# Altium PCB OPA847.PcbDoc
Units mm, origin at the board's own origin, x right, y up, seen from the top; angles counter-clockwise.
Board outline 50 x 30 mm, 2 copper layers (Top Layer, Bottom Layer); 16 components, 10 nets, 45 pads, 8 vias.
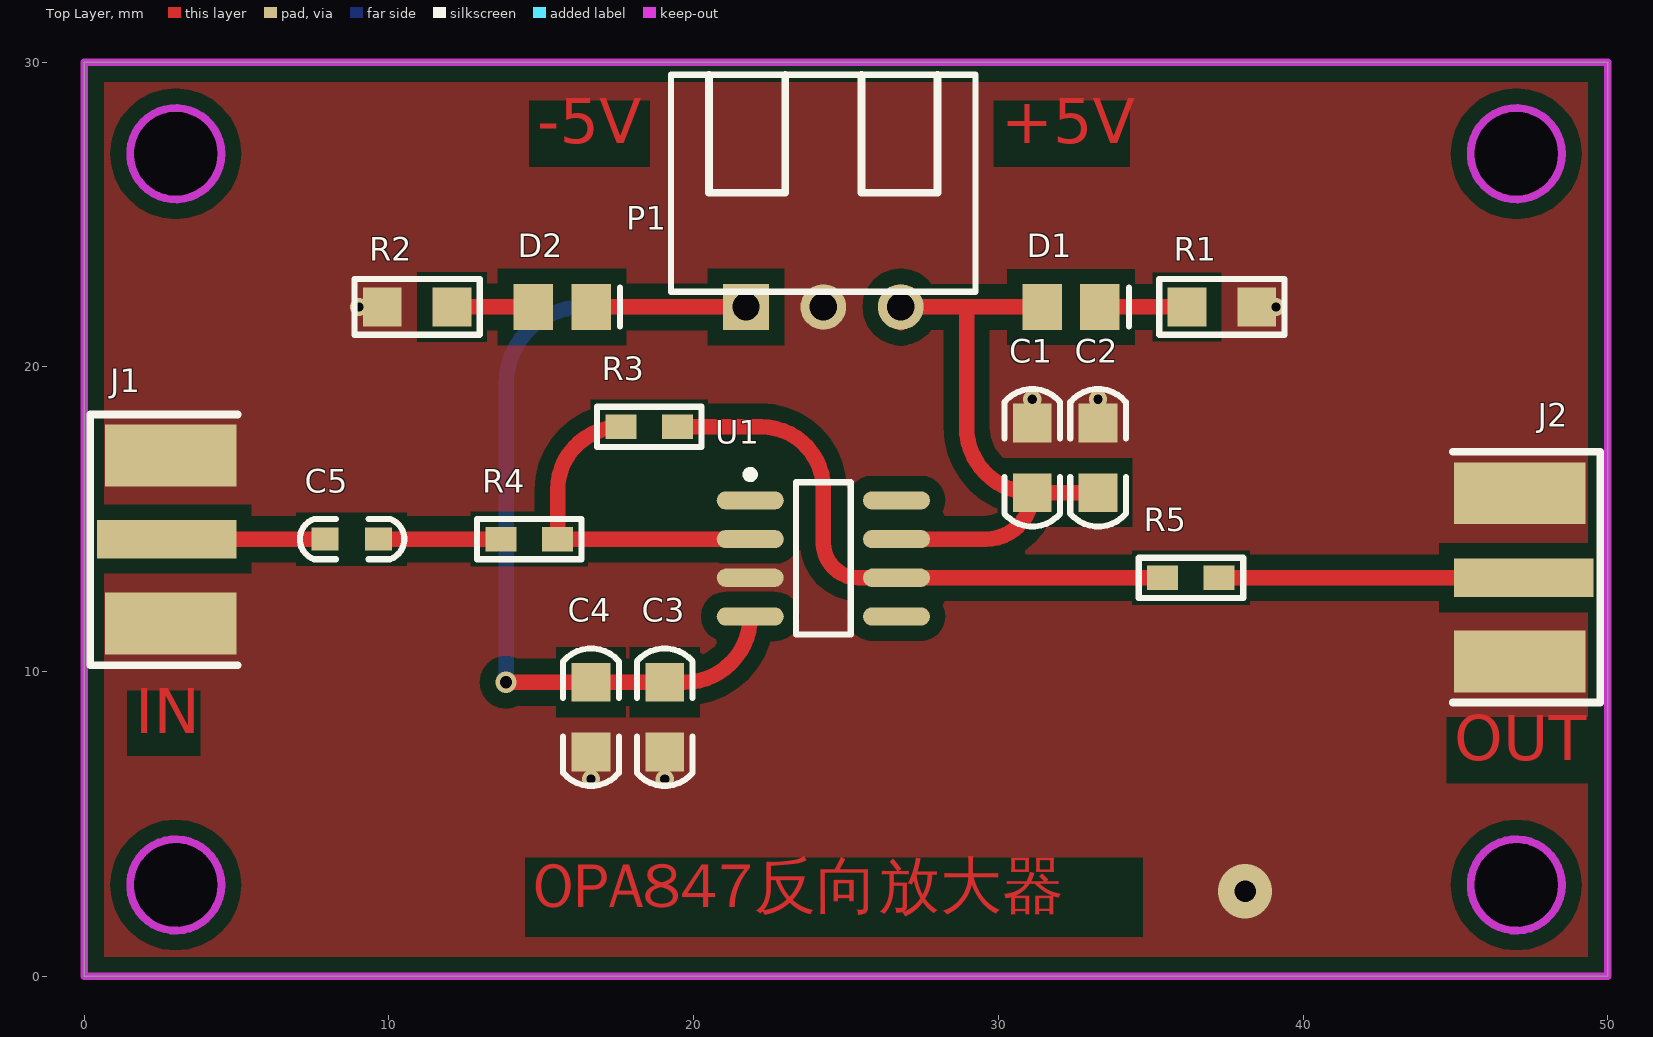
[diagram p0: Top Layer view]
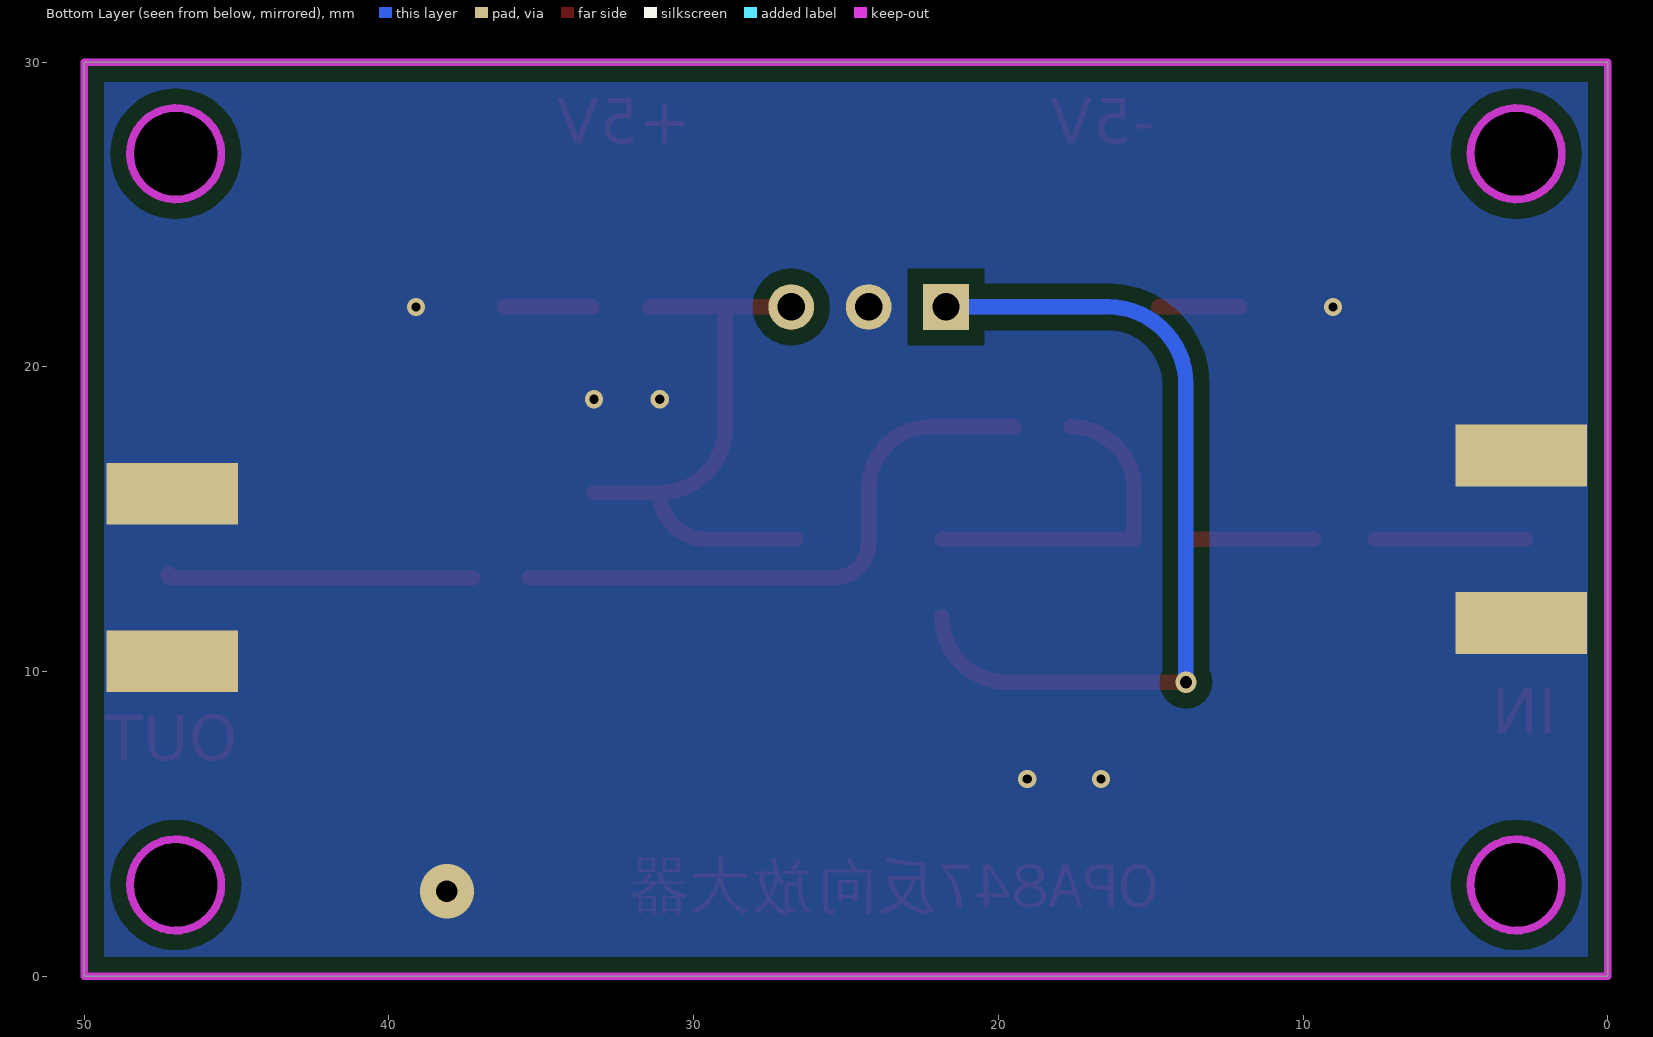
[diagram p1: Bottom Layer view, seen from below]
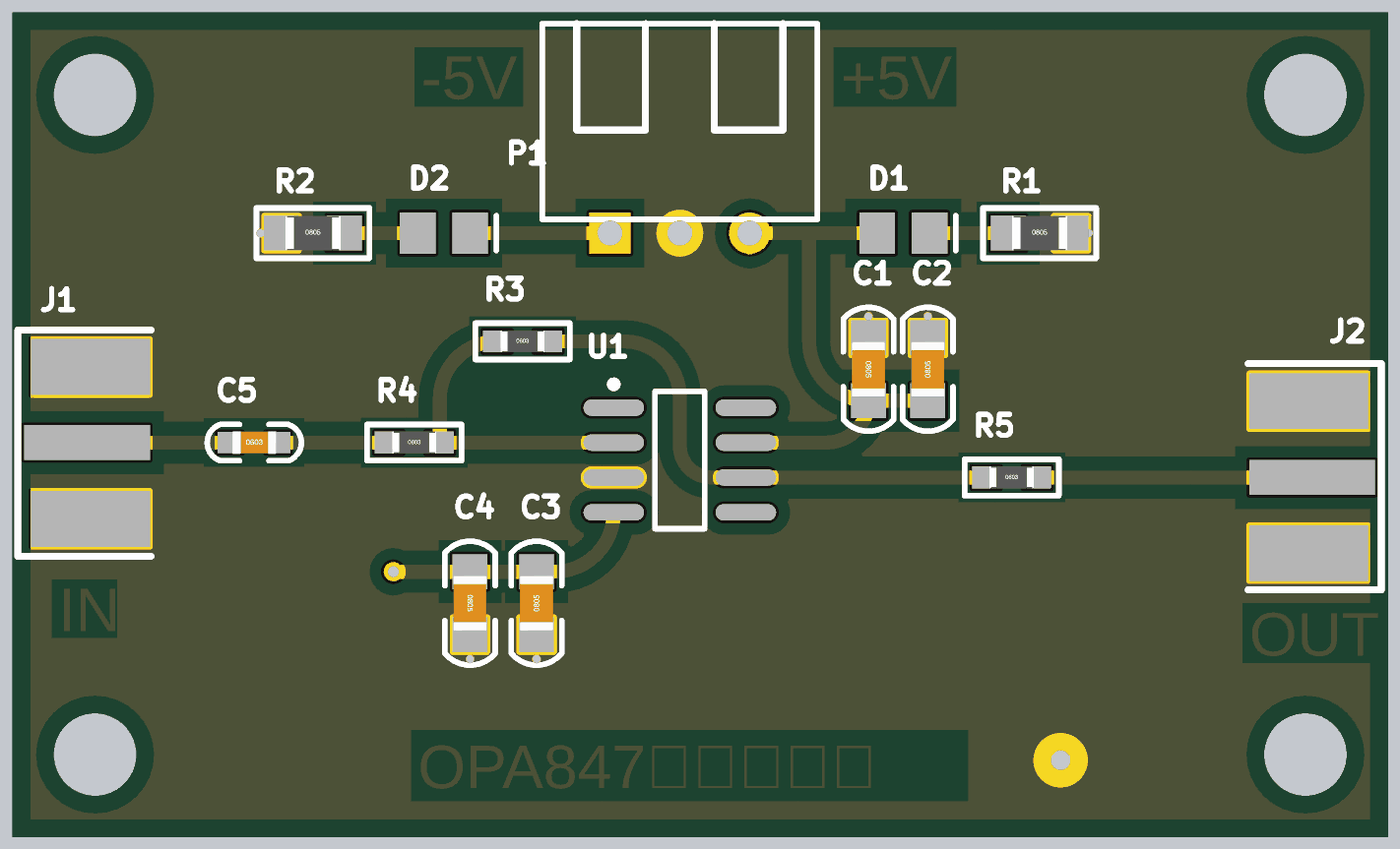
[diagram p2: 3D render of the assembled board from above, using the file's embedded part models]

## Layer stack, top to bottom
Top Solder: solder mask 0.0102, Solder Resist, Dk 3.5
Top Layer: signal copper 0.0356
Dielectric 1: dielectric 0.32, FR-4, Dk 4.8
Bottom Layer: signal copper 0.0356
Bottom Solder: solder mask 0.0102, Solder Resist, Dk 3.5

## Board outline
0,0 50,0 50,30 0,30
cut-out: 45.5,3 ccw(c47,3) 47,1.5 ccw(c47,3) 48.5,3 ccw(c47,3) 47,4.5 ccw(c47,3)
cut-out: 3,1.5 cw(c3,3) 1.5,3 cw(c3,3) 3,4.5 cw(c3,3) 4.5,3 cw(c3,3)
cut-out: 45.5,27 ccw(c47,27) 47,25.5 ccw(c47,27) 48.5,27 ccw(c47,27) 47,28.5 ccw(c47,27)
cut-out: 3,25.5 cw(c3,27) 1.5,27 cw(c3,27) 3,28.5 cw(c3,27) 4.5,27 cw(c3,27)

## Design rules (kind name [scope] priority, off if disabled: settings)
Clearance [All] p1: gap=0.254 ignorepadtopadclearanceinfootprint=FALSE except(0: Arc-Hole Track-Hole SMDPad-Hole THPad-Hole Via-Hole Fill-Hole Poly-Hole Region-Hole Text-Hole; 0.508: Arc-Poly Track-Poly SMDPad-Poly THPad-Poly Via-Poly Fill-Poly Poly-Poly)
MinimumSolderMaskSliver [All] p1: minsoldermaskwidth=0
PolygonConnect [All] p1: connectstyle=Direct reliefconductorwidth=0.254 reliefentries=4 polygonreliefangle="90 Angle" airgapwidth=0.254
RoutingVias [All] p1: holewidth=0.711 width=1.524 viastyle="Through Hole" minholewidth=0.3 minwidth=0.6 maxholewidth=0.711 maxwidth=2.54
SilkToSilkClearance [All] p1: silktosilkclearance=0
SilkToSolderMaskClearance [IsPad] p1: minsilkscreentomaskgap=0 clearancetoexposedcopper=TRUE
SolderMaskExpansion [All] p1: expansion=0.102
Width [All] p1: maxlimit=2.54 minlimit=0.025 preferedwidth=0.762
27 further rules are at their usual default settings.

## Classes and differential pairs
component class OPA847: C1 C2 C3 C5 D1 D2 J1 J2 P1 R1 R2 R3 R4 R5 U1

## Components (designator, comment, footprint, x,y, rotation, side; value= is the part's Value field where it differs from the comment)
C1 "104" "C 0805" 31.115,17.018 r270 top
C2 "10uF" "C 0805" 33.274,17.018 r90 top
C3 "104" "C 0805" 19.05,8.509 r90 top
C4 "10uF" "C 0805" 16.632,8.509 r270 top
C5 "104" "C 0603" 8.788,14.351 r0 top
D1 "LED" LED_0805 32.385,21.971 r0 top
D2 "LED" LED_0805 15.682,21.971 r0 top
J1 "COAX" MCX5.08-5-H 2.707,14.351 r180 top
J2 "COAX" MCX5.08-5-H 47.244,13.081 r0 top
P1 "Header 3" HDR3X1_B2 24.257,21.971 r0 top
R1 "1K" "R 0805" 37.338,21.971 r0 top
R2 "1K" "R 0805" 10.922,21.971 r0 top
R3 "1K" "R 0603" 18.542,18.034 r0 top
R4 "50" "R 0603" 14.605,14.351 r0 top
R5 "50" "R 0603" 36.322,13.081 r0 top
U1 "OPA847" SO8_N 24.257,13.716 r0 top

## Footprints (in the part's own frame and the unit in brackets; to place one, negate y for a bottom-side part, rotate by r counter-clockwise, add the part's x,y. Pads: shape width x height; smd on the part's side, far side on the other; paste and mask are expansions set on the pad)
"C 0603" [mil] "无极性贴片电容"
  rect 35x30 smd: 1(-35,0) 2(34,0)
  silkscreen extent -67,-26 67,26, body extent -31,-16 31,16, height 32
"C 0805" [mil] "无极性贴片电容"
  rect 50x50 smd: 1(-45,0) 2(45,0)
  silkscreen extent -89,-36 89,36, body extent -39,-24 39,24, height 20
HDR3X1_B2 [mm] "Connector; Header; 3 Position"
  rect 1.5x1.5 hole 0.9: 1(-2.54,0)
  round 1.5 hole 0.9: 2(0,0) 3(2.54,0)
  silkscreen extent -5,0.5 5,7.62, body extent -5,0.5 5,7.62, height 6
LED_0805 [mm] "贴片二极管"
  rect 1.3x1.5 smd: 1(-0.95,0) 2(0.95,0)
  silkscreen extent 1.91,-0.64 1.91,0.64
MCX5.08-5-H [mil]
  rect 180x50 smd: 1(0,0)
  rect 170x80 smd: 2(-5,109.25) 5(-5,-108.27)
  rect 170x80 smd far side: 3(-5,108.66) 4(-5,-107.87)
  silkscreen extent -92,-161 99,163, body extent -93,-132 80,134, height 39
"R 0603" [mil] "1/10W贴片电阻"
  rect 40x31.5 smd: 1(-36.5,0) 2(36.5,0)
  silkscreen extent -68,-26 68,26, body extent -31,-16 32,16, height 16
"R 0805" [mil] "1/8W贴片电阻"
  rect 50x50 smd: 1(-45,0) 2(45,0)
  silkscreen extent -81,-36 81,36, body extent -39,-25 39,25, height 20
SO8_N [mm] "SOIC, 8-Leads, Body 4.9x3.9mm, Pitch 1.27mm, IPC Medium Density"
  oval 2.2x0.6 smd: 1(-2.4,1.905) 2(-2.4,0.635) 3(-2.4,-0.635) 4(-2.4,-1.905) 5(2.4,-1.905) 6(2.4,-0.635) 7(2.4,0.635) 8(2.4,1.905)
  silkscreen extent -2.52,-2.5 0.9,2.88, body extent -2,-2.5 2,2.5, height 1.75

## Part data
C1 C2 C3 C4 C5: library part C, "无极性贴片电容"
D1 D2: "发光二极管", LatestRevisionDate=08-Jul-2005, LatestRevisionNote="Mech Layer 1 removed.", PackageReference=LED, Published=8-Jun-2000, Publisher="Altium Limited"
P1: "接插件", LatestRevisionDate=17-Jul-2002, LatestRevisionNote="Re-released for DXP Platform.", Publisher="Altium Limited"
R1 R2 R3 R4 R5: library part R, "贴片电阻"
U1: "Wideband, Ultra-Low Noise, Voltage-Feedback"

## Via types
v1: diameter 0.6, hole 0.3, Top Layer to Bottom Layer, tented both sides, 6 vias
v2: diameter 1.778, hole 0.711, Top Layer to Bottom Layer, 1 vias
v3: diameter 0.7, hole 0.4, Top Layer to Bottom Layer, 1 vias

## Nets (pads, with @x,y where several pads share a name; then routed paths per layer and width w, separated by ;. In a path a pad name is that pad's centre, name@x,y a point inside that pad or via, vN(x,y) a via of type N, cw(c..) or ccw(c..) an arc to the next point about the centre after c; other vN are vias at no path point)
+5V: C1.2 C2.1 D1.1 P1.3 U1.7 | length 20
  Top Layer w0.508: U1.7 29.591,14.351 ccw(c29.591,15.875) C1.2 ; P1.3@26.797,21.449 P1.3 28.956,21.971 ; D1.1 28.956,21.971 ; C2.1 C1.2 ; 28.956,21.971 28.956,18.034 ccw(c31.115,18.034) C1.2
-5V: C3.2 C4.1 D2.2 P1.1 U1.4 | length 33.4
  Top Layer w0.508: v3(13.843,9.652) 16.764,9.652 C3.2 19.698,9.652 ccw(c19.698,11.811) U1.4 ; D2.2 P1.1
  Bottom Layer w0.508: v3(13.843,9.652) 13.843,19.431 cw(c16.383,19.431) 16.383,21.971 P1.1
GND: C1.1 C2.2 C3.1 C4.2 J1.2 J1.3 J1.4 J1.5 J2.2 J2.3 J2.4 J2.5 P1.2 R1.2 R2.1 U1.3
  other v1: 16.632,6.477 19.05,6.477 31.115,18.942 33.274,18.942 9.017,21.971 39.116,21.971
  other v2: 38.1,2.794
NetC5_1: C5.1 J1.1 | length 4.9
  Top Layer w0.508: J1.1 C5.1@7.62,14.351
NetC5_2: C5.2 R4.1 | length 4
  Top Layer w0.508: C5.2 R4.1
NetD1_2: D1.2 R1.1 | length 2.9
  Top Layer w0.508: D1.2 R1.1
NetD2_1: D2.1 R2.2 | length 2.7
  Top Layer w0.508: R2.2 D2.1
NetJ2_1: J2.1 R5.2 | length 10.1
  Top Layer w0.508: R5.2 47.117,13.081 ccw(c47.117,13.208) J2.1@47.244,13.208
NetR3_1: R3.1 R4.2 U1.2 | length 11.2
  Top Layer w0.508: R3.1 ccw(c17.615,15.951) 15.532,15.951 R4.2 U1.2
NetR3_2: R3.2 R5.1 U1.6 | length 19.5
  Top Layer w0.508: R3.2 22.225,18.034 cw(c22.225,16.002) 24.257,16.002 24.257,14.224 ccw(c25.4,14.224) 25.4,13.081 U1.6 R5.1
pads on no net: U1.1 U1.5 U1.8

## Polygon pours and split planes (outlines as drawn)
GND on Bottom Layer "Top Layer-No Net" (solid, remove dead copper, pour order 1): 0,0 50,0 50,30 0,30
GND on Top Layer "GND_L01_P000" (solid, remove dead copper, pour order 0): 0,0 50,0 50,30 0,30

## Keep-outs
Keep-Out Layer:
  circle w0.254: c47,3 r1.5
  circle w0.254: c3,3 r1.5
  circle w0.254: c47,27 r1.5
  circle w0.254: c3,27 r1.5
  pour cut-out: 45.5,27 ccw(c47,27) 47,25.5 ccw(c47,27) 48.5,27 ccw(c47,27) 47,28.5 ccw(c47,27)
  lines w0.254: 0,0 0,30 50,30 50,0 0,0

## Other copper
Top Layer:
  text "-5V" at 14.859,26.852 h2.54
  text "+5V" at 30.099,26.852 h2.54
  text "IN" at 1.671,7.493 h2.54
  text "OUT" at 44.958,6.604 h2.54
  text "OPA847反向放大器" at 14.732,1.778 h2.54